# Altium PCB LEDSequencer.PcbDoc
Units mm, origin at the board's own origin, x right, y up, seen from the top; angles counter-clockwise.
Board outline 65 x 23 mm, 2 copper layers (Top Layer, Bottom Layer), stack 1.671 mm thick; 28 components, 26 nets, 77 pads, 18 vias.
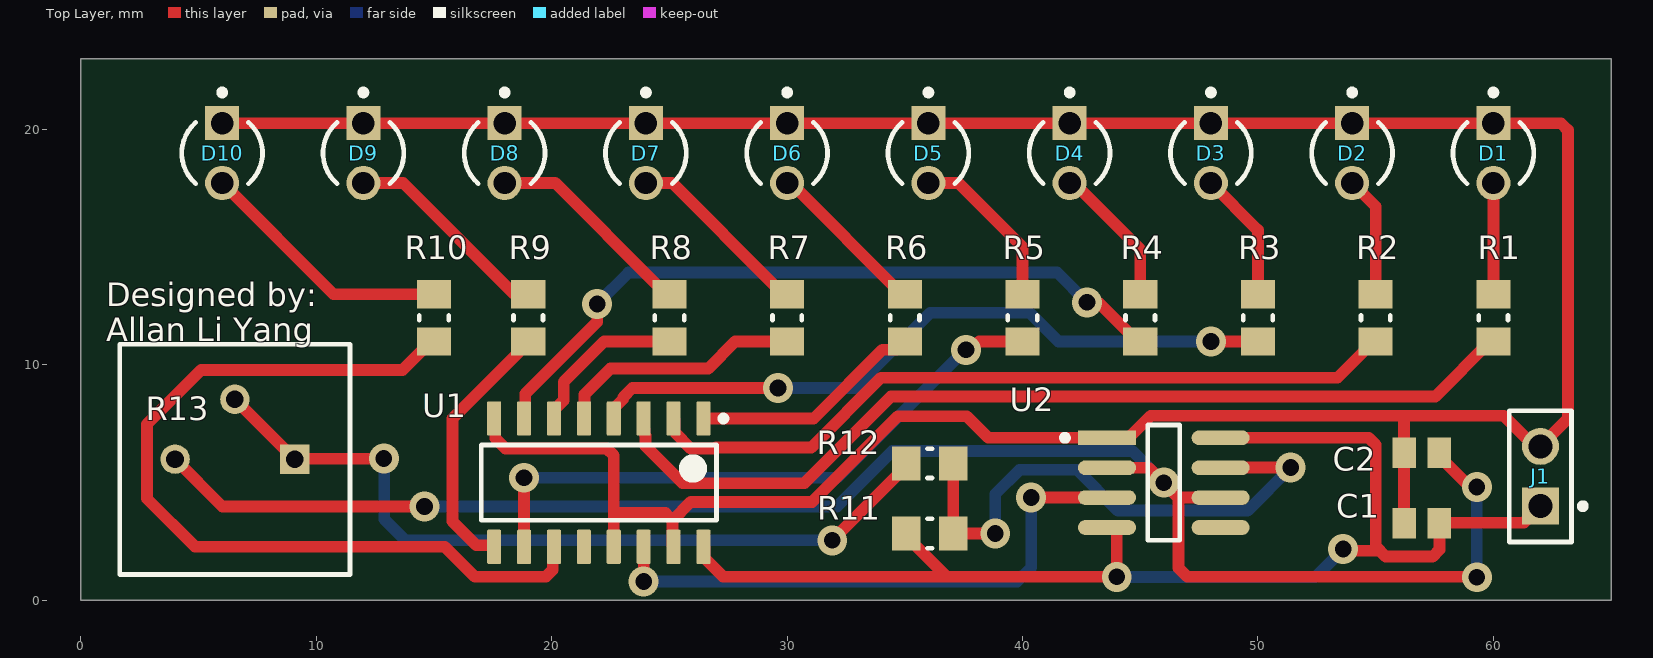
[diagram p0: Top Layer view]
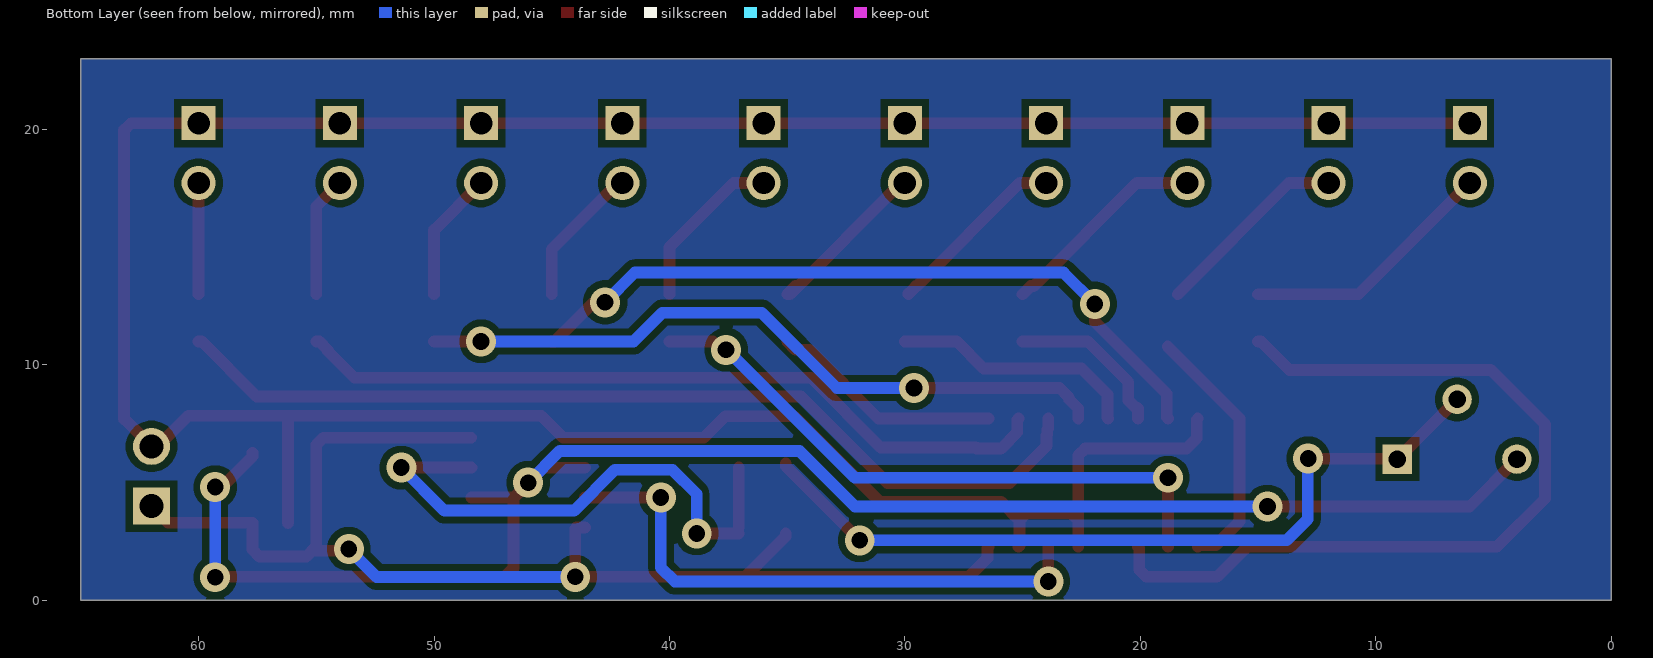
[diagram p1: Bottom Layer view, seen from below]
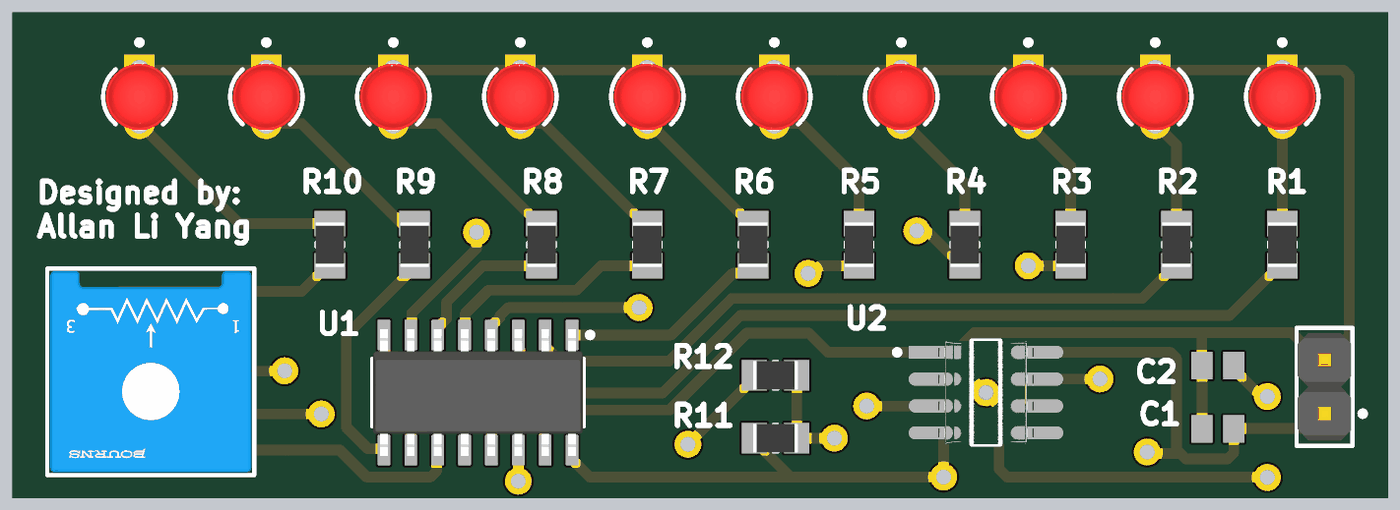
[diagram p2: 3D render of the assembled board from above, using the file's embedded part models]

## Layer stack, top to bottom
Top Solder: solder mask 0.0102, Solder Resist, Dk 3.5
Top Layer: signal copper 0.0356
Dielectric 1: dielectric 1.6, FR-4, Dk 4.8
Bottom Layer: signal copper 0.0356
Bottom Solder: solder mask 0.0102, Solder Resist, Dk 3.5

## Board outline
0,23 65,23 65,0 0,0

## Design rules (kind name [scope] priority, off if disabled: settings)
Clearance [All] p1: gap=0.3 ignorepadtopadclearanceinfootprint=FALSE
PolygonConnect [All] p1: connectstyle=Relief reliefconductorwidth=0.254 reliefentries=4 polygonreliefangle="90 Angle" airgapwidth=0.254
RoutingVias [All] p1: holewidth=0.3 width=0.6 viastyle="Through Hole" minholewidth=0.3 minwidth=0.6 maxholewidth=0.3 maxwidth=0.6
SilkToSolderMaskClearance [IsPad] p1: minsilkscreentomaskgap=0.1 clearancetoexposedcopper=TRUE
SolderMaskExpansion [All] p1: expansion=0.102 istentingtop=FALSE
UnRoutedNet [All] p1: checkbadconnections=TRUE
Width [All] p1: maxlimit=1 minlimit=0.3 preferedwidth=0.5
28 further rules are at their usual default settings.

## Classes and differential pairs
component class LEDSequencer: C1 C2 D1 D2 D3 D4 D5 D6 D7 D8 D9 D10 J1 R1 R2 R3 R4 R5 R6 R7 R8 R9 R10 R11 R12 U1

## Components (designator, comment, footprint, x,y, rotation, side; value= is the part's Value field where it differs from the comment)
C1 "1 uF" CAPC2013X135X45LL10T25 56.957,3.282 r0 top
C2 "1 uF" CAPC2013X135X45LL10T25 56.957,6.269 r0 top
D1 "HLMP-1301" FP-HLMP-1301-MFG 60,19 r270 top
D2 "HLMP-1301" FP-HLMP-1301-MFG 54,19 r270 top
D3 "HLMP-1301" FP-HLMP-1301-MFG 48,19 r270 top
D4 "HLMP-1301" FP-HLMP-1301-MFG 42,19 r270 top
D5 "HLMP-1301" FP-HLMP-1301-MFG 36,19 r270 top
D6 "HLMP-1301" FP-HLMP-1301-MFG 30,19 r270 top
D7 "HLMP-1301" FP-HLMP-1301-MFG 24,19 r270 top
D8 "HLMP-1301" FP-HLMP-1301-MFG 18,19 r270 top
D9 "HLMP-1301" FP-HLMP-1301-MFG 12,19 r270 top
D10 "HLMP-1301" FP-HLMP-1301-MFG 6,19 r270 top
J1 "M20-9990245" FP-M20-9990245-MFG 62,5.27 r90 top
R1 "RC0805FR-071KL" RESC2013X60X35ML10T20 60,12 r90 top
R2 "RC0805FR-071KL" RESC2013X60X35ML10T20 55,12 r90 top
R3 "RC0805FR-071KL" RESC2013X60X35ML10T20 50,12 r90 top
R4 "RC0805FR-071KL" RESC2013X60X35ML10T20 45,12 r90 top
R5 "RC0805FR-071KL" RESC2013X60X35ML10T20 40,12 r90 top
R6 "RC0805FR-071KL" RESC2013X60X35ML10T20 35,12 r90 top
R7 "RC0805FR-071KL" RESC2013X60X35ML10T20 30,12 r90 top
R8 "RC0805FR-071KL" RESC2013X60X35ML10T20 25,12 r90 top
R9 "RC0805FR-071KL" RESC2013X60X35ML10T20 19,12 r90 top
R10 "RC0805FR-071KL" RESC2013X60X35ML10T20 15,12 r90 top
R11 "2.2 k" RESC2013X60X35ML10T20 36.059,2.842 r180 top
R12 "10 k" RESC2013X60X35ML10T20 36.059,5.819 r0 top
R13 "50 k" FP-3386P-MFG 6.54,5.985 r180 top
U1 "CD4017BM" D0016A_N 22,5 r270 top
U2 "NE555DR" FP-D0008A-IPC_A 46,5 r0 top

## Footprints (in the part's own frame and the unit in brackets; to place one, negate y for a bottom-side part, rotate by r counter-clockwise, add the part's x,y. Pads: shape width x height; smd on the part's side, far side on the other; paste and mask are expansions set on the pad)
CAPC2013X135X45LL10T25 [mm] "Chip Capacitor, 2-Leads, Body 2.00x1.25mm, IPC High Density"
  rect 1x1.3 smd: 1(-0.75,0) 2(0.75,0)
  body extent -1.05,-0.67 1.05,0.68, height 1.35
D0016A_N [mm] "SOIC, 16-Leads, Body 10x4mm, Pitch 1.27mm, IPC Medium Density"
  rrect17% 1.45x0.6 smd: 1(-2.725,4.445) 2(-2.725,3.175) 3(-2.725,1.905) 4(-2.725,0.635) 5(-2.725,-0.635) 6(-2.725,-1.905) 7(-2.725,-3.175) 8(-2.725,-4.445) 9(2.725,-4.445) 10(2.725,-3.175) 11(2.725,-1.905) 12(2.725,-0.635) 13(2.725,0.635) 14(2.725,1.905) 15(2.725,3.175) 16(2.725,4.445)
  silkscreen extent -2.85,-5 1.6,5.42, body extent -3,-4.95 3,4.95, height 1.59
FP-3386P-MFG [mm]
  rect 1.25x1.25 hole 0.75 paste-1000 mask+0: 1(-2.54,-0.015)
  round 1.25 hole 0.75 paste-1000 mask+0: 2(0,-2.555) 3(2.54,-0.015)
  silkscreen extent -4.89,-4.89 4.89,4.89, body extent -4.99,-4.99 4.99,4.99, height 0.25
FP-D0008A-IPC_A [mm]
  rect 2.469x0.622 smd paste+0 mask+0: 1(-2.414,1.905)
  rrect100% 2.469x0.622 smd paste+0 mask+0: 2(-2.414,0.635) 3(-2.414,-0.635) 4(-2.414,-1.905) 5(2.414,-1.905) 6(2.414,-0.635) 7(2.414,0.635) 8(2.414,1.905)
  silkscreen extent -4.32,-2.45 0.68,2.45, body extent -4.15,-2.95 4.15,2.95, height 0.25
FP-HLMP-1301-MFG [mm]
  rect 1.45x1.45 hole 0.95 paste-1000 mask+0: 1(-1.27,0)
  round 1.45 hole 0.95 paste-1000 mask+0: 2(1.27,0)
  silkscreen extent -2.7,-1.71 1.3,1.71, body extent -2.22,-2.22 2.22,2.22, height 0.25
FP-M20-9990245-MFG [mm]
  rect 1.57x1.57 hole 1.02 paste-1000 mask+0: 1(-1.27,0)
  round 1.57 hole 1.02 paste-1000 mask+0: 2(1.27,0)
  silkscreen extent -2.79,-1.92 2.79,1.32, body extent -2.89,-1.42 2.89,1.42, height 0.25
RESC2013X60X35ML10T20 [mm] "Chip Resistor, 2-Leads, Body 2.1x1.35mm, IPC Low Density"
  rect 1.2x1.45 smd: 1(-1,0) 2(1,0)
  silkscreen extent -0.1,-0.63 0.1,0.63, body extent -1.05,-0.68 1.05,0.67, height 0.6

## Part data
C1 C2: library part CMP-1036-04761-2, Manufacturer=Murata, Part Number=GRM21BR71H105KA12L
D1 D2 D3 D4 D5 D6 D7 D8 D9 D10: library part CMP-18399-000007-1, "LED RED DIFFUSED T-1 T/H", Colour=Red, Forward Current=10mA, Forward Voltage=1.9V, Manufacturer=Broadcom, Max Junction Temp=+110°C, Package=0, Reverse Voltage=5V, Temperature="-40°C to +100°C", Temperature Range High=+100°C, Temperature Range Low=-40°C, Automotive=No, Category=Diode, ComponentLink2Description=Datasheet, ComponentLink2URL=https://docs.broadcom.com/docs/AV02-1555EN, Device Class L1=Optoelectronics, Device Class L2=LEDs, Device Class L3=unset, Digikey Description="LED RED DIFFUSED T-1 T/H", Lead Free=Yes, Led Orientation=Straight, Luminous Intensity=3.4mcd, Manufacturer Part Number=HLMP-1301, Mouser Description="Standard LEDs - Through Hole Red Diffused 635nm 3.4mcd", Octopart=https://octopart.com/hlmp-1301-broadcom-71130345, Peak Emmision Wavelength=635nm, RoHS=TRUE, Viewing Angle=60°, Wavelength=626nm
J1: library part CMP-15831-000105-1, "CONN HEADER VERT 2POS 2.54MM", Case/Package=SIL, Color=Black, Contact Resistance=25mR, Current=3A, Flammability Rating="UL94 V-0", Insulation Resistance=10GR, Max Operating Temperature=105°C, Min Operating Temperature=-40°C, Package Quantity=1000, Voltage=50V, Voltage Rating (AC)=750V, Connector Type="Male Pin", Contact Finish - Mating=GOLD, Contact Material=Brass, Contact Mating Length=0.24inch, Contact Plating=Gold, Contact Shape=Square, Contact Type="Male Pin", Current Rating=3A, Depth=2.54mm, Fastening Type=Pull, Gender=Male, Height=0.12inch, Housing Color=Black, Housing Material=Nylon, Insulation Color=Black, Insulation Material=Nylon, Lead Pitch=2.54mm, Length=5.08mm, Mated Stacking Heights=16.54mm, Mating Cycles=300, Max Current Rating=3A, Mount="Through Hole", Number of Contacts=2, Number of Poles=2, Number of Positions=2, Number of Rows=1, Orientation=Straight, Packaging=Bulk, Pitch=2.54mm, Radiation Hardening=No, Reach SVHC Compliant=Yes, Series=M20, Termination=Solder, Weight=0.25lb, Width=0.25inch, Working Voltage=750V
R1 R2 R3 R4 R5 R6 R7 R8 R9 R10 R11 R12: library part CMP-2100-03671-1, "Chip Resistor, 1 KOhm, +/- 1%, 125 mW, -55 to 155 degC, 0805 (2012 Metric), RoHS, Tape and Reel", Case Code (Imperial)=0805, Case Code (Metric)=2012, Manufacturer=Yageo, Max Operating Temperature=155degC, Max Power Dissipation=125mW, Min Operating Temperature=-55degC, Package Description="2-Pin Surface Mounted Device, Body 2 x 1.25 mm", Package Quantity=1, Resistance=1KOhm, Temperature Coefficient=100ppm/degreesC, Tolerance=1%, Voltage Rating=150V, Case/Package=0805, Composition=ThickFilm, Datasheet URL=http://www.yageo.com/NewPortal/yageodocoutput?fileName=/pdf/R-Chip/PYu-RC_Group_51_RoHS_L_5.pdf, Datasheet Version="Rev. 5, 10/2016", Depth=1.25mm, Height=0.024inch, Lead Free=LeadFree, Length=0.079inch, Manufacturer URL=http://www.yageo.com/, Military Standard=Not, Number of Pins=2, Number of Terminations=2, Package Reference=0805, Packaging=TapeandReel, Power Rating=125mW, REACH SVHC=Unknown, RoHSCompliant=true, Termination=SMD/SMT, Voltage Rating (DC)=150V, Width=0.049inch
R13: library part CMP-2000-05592-8, "TRIMMER 100K OHM 0.5W PC PIN TOP", Color=Blue, Manufacturer Series=3386, Max Operating Temperature=125°C, Max Power Dissipation=500mW, Min Operating Temperature=-55°C, Package Quantity=100, Resistance=100kR, Resistance Law=Linear, Resistance Tolerance=10%, Resistor Type=Cermet, Temperature Coefficient=100ppm/°C, Voltage Rating=300V, Actuator Orientation=Vertical, Actuator Type=SCREW, Contact Plating=Tin, Depth=9.53mm, Height=4.83mm, Lead Free="Contains Lead", Length=9.53mm, Military Standard=Not, Mount="Through Hole", Number of Pins=3, Number of Terminals/Pins=3, Number of Turns=1, Packaging=Rail/Tube, Power Rating=500mW, Radiation Hardening=No, Reach SVHC Compliant=Yes, RoHS Compliant=Yes, Series="Trimpot® 3386 - Sealed", Taper=Linear, Technology=CERMET, Terminal Finish=Tin, Termination=Pin, Tolerance=10%, Type=Potentiometer, Weight=0.03oz, Width=9.53mm
U1: library part CMP-1623-00071-2, "CMOS Decade Counter with 10 Decoded Outputs, D0016A, TUBE", F @ Nom Voltage(Max)(Mhz)=8, Generic Part Number=CD4017B, ICC @ Nom Voltage(Max)(mA)=0.03, Manufacturer="Texas Instruments", Operating Temperature Range(C)="-55 to 125", Rating=Military, tpd @ Nom Voltage(Max)(ns)=270, Voltage(Nom)(V)=10, Bits(#)=10, Code_JEDEC="MS-012 variation AC", DatasheetVersion=SCHS027C, Function=Counter, Input Type=CMOS, Inputs=1, Output Drive (IOL/IOH)(Max)(mA)=1.5/-1.5, Output Type=CMOS, PackageReference=D0016A, Schmitt Trigger=No, Technology Family=CD4000, Type=Decade, VCC(Max)(V)=18, VCC(Min)(V)=3
U2: library part CMP-1685-00007-2, "IC OSC SGL TIMER 100KHZ 8-SOIC", Case/Package=SOIC, Frequency=100kHz, High Level Output Current=-200mA, Low Level Output Current=200mA, Max Operating Temperature=70°C, Max Supply Voltage=16V, Min Operating Temperature=0°C, Min Supply Voltage=4.5V, Operating Supply Current=10mA, Package Quantity=2500, Quiescent Current=15mA, Contact Plating=Gold, Height=1.58mm, Lead Free="Lead Free", Length=4.9mm, Mount="Surface Mount", Number of Pins=8, Number of Timers/Counters=1, Packaging="Tape and Reel", Radiation Hardening=No, REACH SVHC="No SVHC", Weight=0.002561oz, Width=3.91mm

## Via types
v1: diameter 1.27, hole 0.711, Top Layer to Bottom Layer, 18 vias

## Nets (pads, with @x,y where several pads share a name; then routed paths per layer and width w, separated by ;. In a path a pad name is that pad's centre, name@x,y a point inside that pad or via, vN(x,y) a via of type N, cw(c..) or ccw(c..) an arc to the next point about the centre after c; other vN are vias at no path point)
GND: C1.1 C2.1 D1.1 D2.1 D3.1 D4.1 D5.1 D6.1 D7.1 D8.1 D9.1 D10.1 J1.2 U1.8 U1.13 U1.15 U2.1 | length 129.7
  Top Layer w0.5: D10.1 D9.1 D8.1 D7.1 D6.1 D5.1 D4.1 D3.1 D2.1 D1.1 62.872,20.27 63.165,19.977 63.165,7.705 J1.2 61.74,6.54 60.44,7.84 56.203,7.84 ; U1.8 17.605,7.675 17.605,6.882 18.037,6.45 22.342,6.45 22.635,6.157 22.635,3.412 ; U1.13 22.635,3.412 ; 25.125,3.39 25.914,4.179 31.064,4.179 34.704,7.819 37.628,7.819 38.542,6.905 U2.1 44.51,6.905 45.445,7.84 56.203,7.84 ; U1.15 25.125,2.325 25.125,3.412 24.832,3.705 22.929,3.705 22.635,3.412 ; C2.1@56.203,6.274 56.203,7.84 ; C1.1 C2.1
NetC2_2: C2.2 R13.3 U2.2 U2.6 | length 71.6
  Top Layer w0.5: R13.3 6.015,3.985 v1(14.595,3.985) ; U2.2 45.352,5.635 45.994,4.994 46.622,4.365 ; U2.6 46.622,4.365 ; C2.2 57.707,6.119 58.868,4.958 59.148,4.958 v1(59.296,4.811) ; v1@59.278,1 47,1 46.622,1.378 46.622,4.365
  Bottom Layer w0.5: v1(14.595,3.985) 32.114,3.985 34.479,6.35 44.65,6.35 v1(46,5) ; v1(59.296,0.982) v1(59.296,4.811)
NetD1_2: D1.2 R1.2 | length 4.7
  Top Layer w0.5: R1.2 D1.2
NetD2_2: D2.2 R2.2 | length 5.1
  Top Layer w0.5: D2.2 55,16.73 R2.2
NetD3_2: D3.2 R3.2 | length 5.6
  Top Layer w0.5: D3.2 50,15.73 R3.2
NetD4_2: D4.2 R4.2 | length 6.1
  Top Layer w0.5: D4.2 42.184,17.73 45,14.914 R4.2
NetD5_2: D5.2 R5.2 | length 7.1
  Top Layer w0.5: D5.2 37.27,17.73 40,15 R5.2
NetD6_2: D6.2 R6.2 | length 7.6
  Top Layer w0.5: D6.2@30.092,17.822 D6.2 30.145,17.73 34.875,13 R6.2 R6.2@34.65,13.35
NetD7_2: D7.2 R7.2 | length 7.8
  Top Layer w0.5: D7.2 25.112,17.73 29.492,13.35 29.525,13.35 29.842,13.033 R7.2@29.842,13
NetD8_2: D8.2 R8.2 | length 9
  Top Layer w0.5: D8.2 18.182,17.73 20.142,17.73 24.522,13.35 24.65,13.35 R8.2
NetD9_2: D9.2 R9.2 | length 8.4
  Top Layer w0.5: D9.2 13.682,17.73 R9.2@18.412,13
NetD10_2: D10.2 R10.2 | length 11
  Top Layer w0.5: D10.2 10.73,13 R10.2
NetR1_1: R1.1 U1.3 | length 40.4
  Top Layer w0.5: U1.3 23.905,7.3 23.955,7.25 23.955,7.033 23.984,7.005 23.984,6.553 25.558,4.979 30.733,4.979 34.41,8.656 57.531,8.656 59.875,11 R1.1
NetR2_1: R2.1 U1.2 | length 32.6
  Top Layer w0.5: U1.2 25.225,7.675 25.225,7.137 25.912,6.45 26.943,6.45 26.983,6.49 31.02,6.49 33.986,9.456 53.378,9.456 54.525,10.603 54.525,10.65 54.875,11 R2.1
NetR3_1: R3.1 U1.4 | length 30
  Top Layer w0.5: U1.4 22.635,8.15 23.039,8.554 23.039,8.631 23.428,9.021 v1(29.612,9.021) ; v1(48,11) R3.1
  Bottom Layer w0.5: v1(29.612,9.021) 32.882,9.021 36.082,12.221 40.301,12.221 41.522,11 v1(48,11)
NetR4_1: R4.1 U1.7 | length 31
  Top Layer w0.5: U1.7 18.875,7.775 18.875,8.772 21.93,11.828 v1(21.93,12.593) ; v1(42.733,12.659) 43.216,12.659 44.875,11 R4.1
  Bottom Layer w0.5: v1(21.93,12.593) 23.264,13.927 41.465,13.927 v1(42.733,12.659)
NetR5_1: R5.1 U1.10 | length 26.5
  Top Layer w0.5: U1.10 v1(18.825,5.208) ; v1(37.594,10.641) 37.803,10.641 38.162,11 R5.1
  Bottom Layer w0.5: v1(18.825,5.208) 32.132,5.208 v1@37.565,10.641
NetR6_1: R6.1 U1.1 | length 9.9
  Top Layer w0.5: U1.1 31.123,7.725 34.048,10.65 34.65,10.65 R6.1
NetR7_1: R7.1 U1.5 | length 10.6
  Top Layer w0.5: U1.5 21.396,7.756 21.396,8.75 22.491,9.845 26.644,9.845 27.799,11 R7.1
NetR8_1: R8.1 U1.6 | length 7
  Top Layer w0.5: U1.6 20.095,8.15 20.145,8.2 20.222,8.2 20.515,8.493 20.515,9.281 22.234,11 R8.1
NetR9_1: R9.1 U1.9 | length 10.9
  Top Layer w0.5: U1.9 17.555,2.289 17.505,2.339 16.798,2.339 15.78,3.357 15.78,7.723 R9.1@18.836,10.779
NetR10_1: R10.1 U1.11 | length 36.6
  Top Layer w0.5: R10.1 14.875,11 13.662,9.787 5.109,9.787 2.804,7.482 2.804,4.327 4.85,2.281 15.458,2.281 16.739,1 19.752,1 20.045,1.293 20.045,2.225 U1.11
NetR11_1: R11.1 R12.2 U2.7 | length 23.5
  Top Layer w0.5: R11.1 v1(38.842,2.842) ; R11.1@37.059,3.076 R12.2@37.059,5.646 ; U2.7 48.418,5.639 51.385,5.639 v1(51.389,5.643)
  Bottom Layer w0.5: v1(38.842,2.842) 38.842,4.518 39.874,5.55 42.315,5.55 44.05,3.815 49.561,3.815 v1(51.389,5.643)
NetR12_1: R12.1 R13.1 R13.2 | length 33.9
  Top Layer w0.5: R13.2 9.089,5.991 9.113,6.014 12.853,6.014 v1(12.867,6.029) ; v1(31.917,2.551) 35.059,5.694 R12.1
  Bottom Layer w0.5: v1@12.882,6.014 12.882,3.442 13.773,2.551 v1(31.917,2.551)
NetU1_14: U1.14 U2.3 | length 24.4
  Top Layer w0.5: v1(23.905,0.806) U1.14 ; v1(40.365,4.365) U2.3
  Bottom Layer w0.5: v1@23.907,0.804 39.774,0.804 40.365,1.395 v1(40.365,4.365)
VCC: C1.2 J1.1 R11.2 U1.16 U2.4 U2.8 | length 54.8
  Top Layer w0.5: U1.16 26.495,2.225 26.495,1.786 27.281,1 36.776,1 ; R11.2 35.059,2.717 36.776,1 ; U2.4 43.944,3.095 44,3.039 v1(44,1) 36.776,1 ; U2.8 54.707,6.904 55,6.611 55,2.293 55.432,1.861 57.415,1.861 57.707,2.154 C1.2 ; v1(53.619,2.185) 53.692,2.112 55.147,2.112 55.164,2.129 ; C1.2@57.707,3.296 61.296,3.296 J1.1
  Bottom Layer w0.5: v1@44.011,0.989 52.43,0.989 53.619,2.178 v1(53.619,2.185)
pads on no net: U1.12 U2.5

## Polygon pours and split planes (outlines as drawn)
no net on Bottom Layer "NONET_L02_P000" (solid, pour order 0): 0,0 65,0 65,23 0,23

## Silkscreen, mask and mechanical layers (free items; w line width, h text height)
Top Overlay:
  text "Designed by: / Allan Li Yang" at 1.074,10.996 h1